# EAGLE board mediator (EAGLE 5.03)
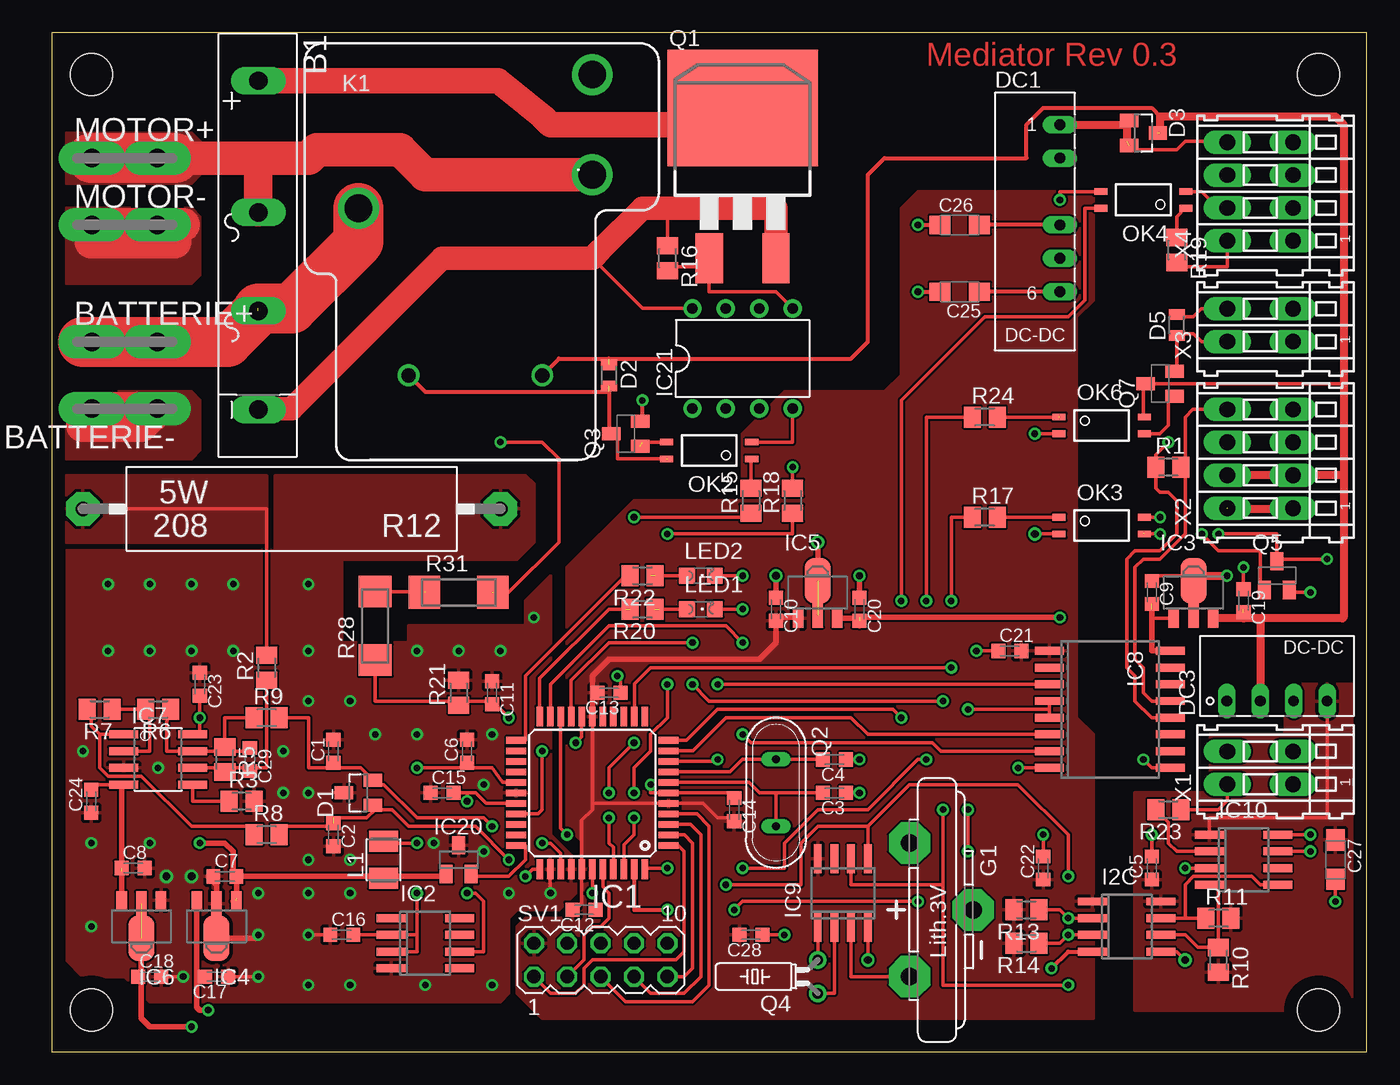
[diagram p0: board, top side]
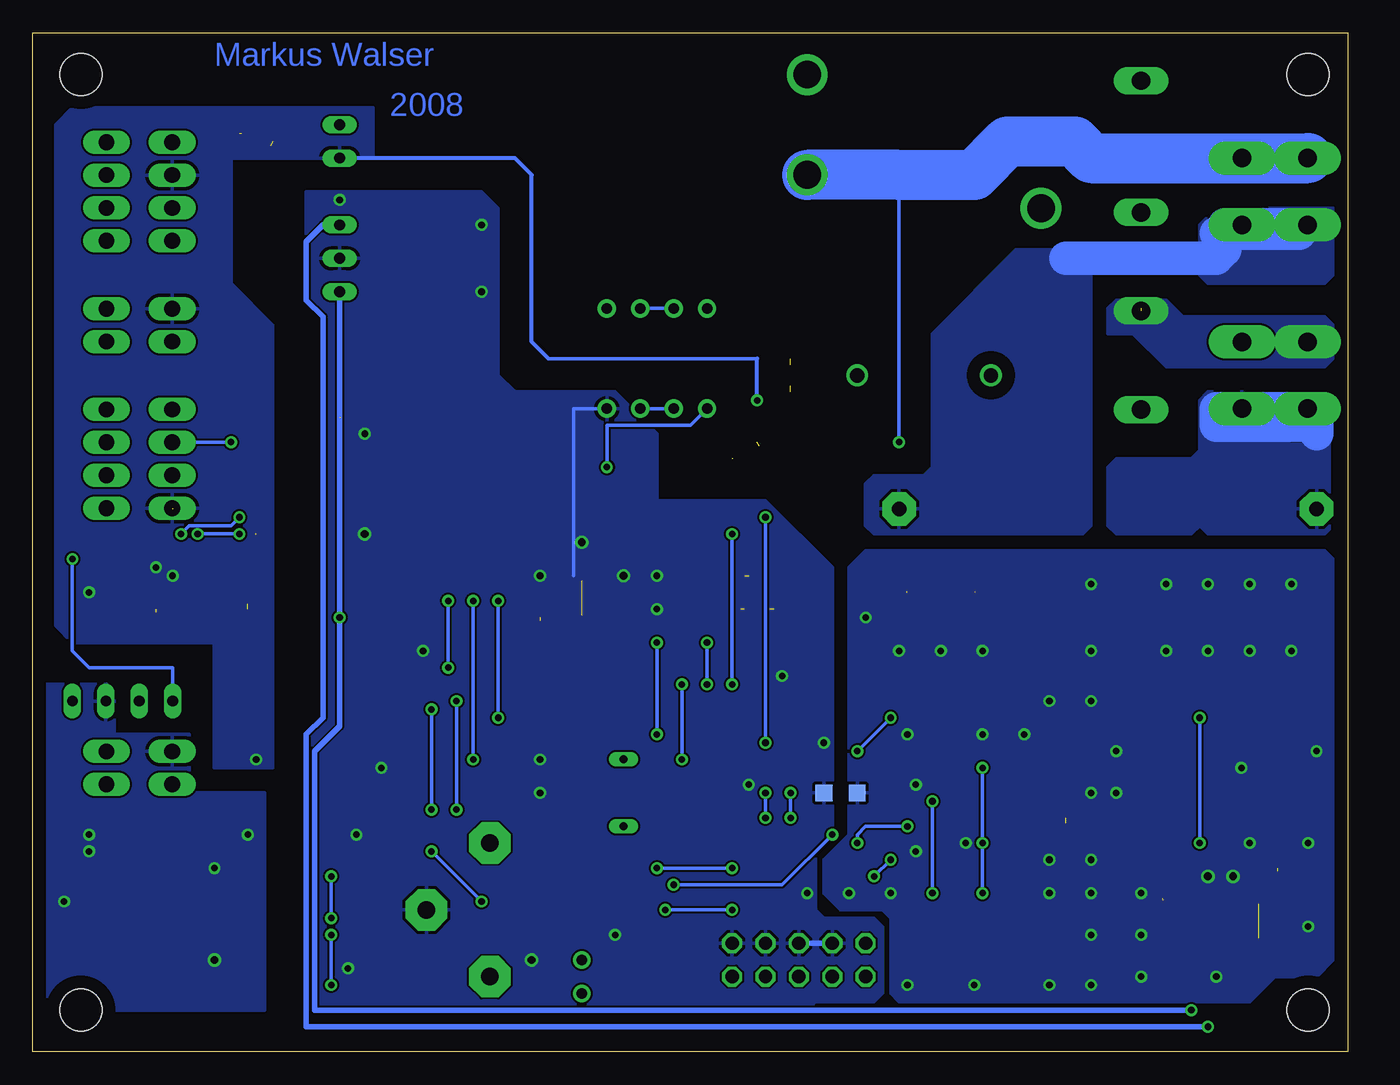
[diagram p1: board, bottom side, seen from below]

Size 100 x 77.46 mm. Coordinates in mm from the lower left corner, seen from the top.
Outline: 0,0 100,0 100,77.46 0,77.46 0,0
Copper layers (1*16): Top 0.035mm / dielectric 1.5mm / Bottom 0.035mm
Design rules "default *": minimum track width 6mil, minimum drill 12mil, track to track 6mil, track to pad 6mil, pad to pad 6mil, via to via 6mil, smd to smd 6mil, copper to edge 40mil, drill to drill 8mil, minimum pad ring 10mil, minimum via ring 8mil, stop-mask expansion 4mil, vias tented up to drill 25mil, thermal gap 10mil
Holes 3.2 mm at 96.36,3.17 3.01,3.17 96.36,74.29 3.01,74.29

## Footprints (pad centres in the part's own frame; a part is rotated, then mirrored left to right if it is on the bottom)
FB32 = drill 1.397 long: + -13.5,0; - 11.494,0; AC1 -3.492,0; AC2 4.001,0
F061.100 = drill 1.4 pad 2.54 long: A1 -2.5,0; A2 2.5,0
C0603K = smd 1.05 x 1.08: 1 -0.875,0; 2 0.875,0
SMC_A = smd 1.6 x 1.4: + -1.5,0; - 1.5,0
SOT23 = smd 1 x 1.4: 1 -0.95,-1.1; 2 0.95,-1.1; 3 0,1.1
MICROMELF-R = smd 0.8 x 1.2: A 0.8,0; C -0.8,0
NMA = drill 0.813 long: 1 0,6.35; 2 0,3.81; 4 0,-1.27; 5 0,-3.81; 6 0,-6.35
NME = drill 0.813 long: 1 0,3.81; 2 0,1.27; 3 0,-1.27; 4 0,-3.81
CR2032V = drill 1.321 pad 3.15 octagon: + -2.54,-5.08; +@1 -2.54,5.08; - 2.286,0
SO8 = smd 0.6 x 2.2: 1 -1.905,-2.6; 2 -0.635,-2.6; 3 0.635,-2.6; 4 1.905,-2.6; 5 1.905,2.6; 6 0.635,2.6; 7 -0.635,2.6; 8 -1.905,2.6
TQFP44 = smd 1.5 x 0.5: 1 -5.8,4; 2 -5.8,3.2; 3 -5.8,2.4; 4 -5.8,1.6; 5 -5.8,0.8; 6 -5.8,0; 7 -5.8,-0.8; 8 -5.8,-1.6; 9 -5.8,-2.4; 10 -5.8,-3.2; 11 -5.8,-4; 23 5.8,-4; 24 5.8,-3.2; 25 5.8,-2.4; 26 5.8,-1.6; 27 5.8,-0.8; 28 5.8,0; 29 5.8,0.8; 30 5.8,1.6; 31 5.8,2.4; 32 5.8,3.2; 33 5.8,4 | smd 0.5 x 1.5: 12 -4,-5.8; 13 -3.2,-5.8; 14 -2.4,-5.8; 15 -1.6,-5.8; 16 -0.8,-5.8; 17 0,-5.8; 18 0.8,-5.8; 19 1.6,-5.8; 20 2.4,-5.8; 21 3.2,-5.8; 22 4,-5.8; 34 4,5.8; 35 3.2,5.8; 36 2.4,5.8; 37 1.6,5.8; 38 0.8,5.8; 39 0,5.8; 40 -0.8,5.8; 41 -1.6,5.8; 42 -2.4,5.8; 43 -3.2,5.8; 44 -4,5.8
SO08 = smd 0.6 x 2.2: 1 -1.905,-2.6; 2 -0.635,-2.6; 3 0.635,-2.6; 4 1.905,-2.6; 5 1.905,2.6; 6 0.635,2.6; 7 -0.635,2.6; 8 -1.905,2.6
SOT89 = smd 0.8 x 1.4: 1 -1.499,-1.981; 3 1.499,-1.981 | smd 0.8 x 1.9: 2 0,-1.727 | smd 2 x 3.5: 2.1 0,0.889
SO08' = smd 0.61 x 2.21: 1 -1.905,-2.616; 2 -0.635,-2.616; 3 0.635,-2.616; 4 1.905,-2.616; 5 1.905,2.616; 6 0.635,2.616; 7 -0.635,2.616; 8 -1.905,2.616
SO16W = smd 0.6 x 2.2: 1 -4.445,-4.6; 2 -3.175,-4.6; 3 -1.905,-4.6; 4 -0.635,-4.6; 5 0.635,-4.6; 6 1.905,-4.6; 7 3.175,-4.6; 8 4.445,-4.6; 9 4.445,4.6; 10 3.175,4.6; 11 1.905,4.6; 12 0.635,4.6; 13 -0.635,4.6; 14 -1.905,4.6; 15 -3.175,4.6; 16 -4.445,4.6
DIL08 = drill 0.8 pad 1.4 round: 1 -3.81,-3.81; 2 -1.27,-3.81; 3 1.27,-3.81; 4 3.81,-3.81; 5 3.81,3.81; 6 1.27,3.81; 7 -1.27,3.81; 8 -3.81,3.81
JT-PCB = drill 1.1 round: 1 5.08,0; 2 -5.08,0 | drill 2.1 round: C -8.89,12.7; NC 8.89,22.86; NO 8.89,15.24
L3225M = smd 1.6 x 2.2: 1 -1.4,0; 2 1.4,0
CHIPLED_0805 = smd 1.2 x 1.2: A 0,-1.05; C 0,1.05
MINI-FLAT-4 = smd 1 x 0.5: 1 -3.24,0.635; 2 -3.24,-0.635; 3 3.24,-0.635; 4 3.24,0.635
D2PACK = smd 2.083 x 3.81: 1 -2.54,-8.89; 3 2.54,-8.89 | smd 11.43 x 8.89: 2 0,2.54
QS = drill 0.61 long: 1 -2.54,0; 2 2.54,0
SOT23-BEC = smd 1 x 1.4: B -0.95,-1.1; C 0,1.1; E 0.95,-1.1
TC26H = drill 0.813 round: 1 -1.27,0; 2 1.27,0
M0805 = smd 1.3 x 1.6: 1 -0.95,0; 2 0.95,0
KH208-8 = drill 1.1 pad 2.54 octagon: 1 -15.875,0; 2 15.875,0
MINI_MELF-0207W = smd 2.4 x 2.5: 1 -2.6,0; 2 2.6,0
MA05-2 = drill 1.016 octagon: 1 -5.08,-1.27; 2 -5.08,1.27; 3 -2.54,-1.27; 4 -2.54,1.27; 5 0,-1.27; 6 0,1.27; 7 2.54,-1.27; 8 2.54,1.27; 9 5.08,-1.27; 10 5.08,1.27
233-102 = drill 1.2 long: A1 -1.25,2.5; A2 1.25,2.5; B1 -1.25,-2.5; B2 1.25,-2.5
233-104 = drill 1.2 long: A1 -3.75,2.5; A2 -1.25,2.5; A3 1.25,2.5; A4 3.75,2.5; B1 -3.75,-2.5; B2 -1.25,-2.5; B3 1.25,-2.5; B4 3.75,-2.5
GND-GNDA = smd 1.27 x 1.27: GND -1.27,0; GNDA 1.27,0

## Placement (x,y rotation side)
B1  RECTIFIER-FB32  [FB32]  15.71,60.32 270 top
BATTERIE+  PIN2F061.100  [F061.100]  5.55,53.97 0 top
BATTERIE-  PIN2F061.100  [F061.100]  5.55,48.89 180 top
C1  100nF  [C0603K]  21.42,22.86 90 top
C2  100nF  [C0603K]  21.42,16.5 270 top
C3  18pF  [C0603K]  59.52,19.68 180 top
C4  18pF  [C0603K]  59.52,22.22 180 top
C5  100nF  [C0603K]  83.66,13.97 90 top
C6  100nF  [C0603K]  31.58,22.86 90 top
C7  100nF  [C0603K]  13.17,13.33 0 top
C8  100nF  [C0603K]  6.18,13.97 0 top
C9  100nF  [C0603K]  83.66,34.92 270 top
C10  100nF  [C0603K]  55.08,33.65 270 top
C11  100nF  [C0603K]  33.49,27.3 270 top
C12  100nF  [C0603K]  40.48,10.79 180 top
C13  100nF  [C0603K]  42.38,27.3 180 top
C14  100nF  [C0603K]  51.91,18.41 270 top
C15  100nF  [C0603K]  29.68,19.68 0 top
C16  100nF  [C0603K]  22.06,8.89 0 top
C17  100nF  [C0603K]  12.54,5.71 180 top
C18  100nF  [C0603K]  7.46,5.71 0 top
C19  100nF  [C0603K]  90.64,34.29 270 top
C20  100nF  [C0603K]  61.43,33.65 270 top
C21  100nF  [C0603K]  72.86,30.47 0 top
C22  100nF  [C0603K]  75.4,13.97 90 top
C23  100nF  [C0603K]  11.27,27.93 270 top
C24  100nF  [C0603K]  3.01,19.04 90 top
C25  10uF  [SMC_A]  69.05,57.78 180 top
C26  10uF  [SMC_A]  69.05,62.86 0 top
C27  10uF  [SMC_A]  97.62,14.6 270 top
C28  100nF  [C0603K]  53.17,8.89 180 top
C29  100nF  [C0603K]  15.08,22.22 270 top
D1  BAS40-06  [SOT23]  23.33,19.68 90 top
D2  1N4148  [MICROMELF-R]  42.38,51.43 270 top
D3  BAS40-06  [SOT23]  83.02,69.84 270 top
D5  1N4148  [MICROMELF-R]  85.56,55.24 90 top
DC1  NMA1209SC  [NMA]  76.67,64.13 0 top
DC3  NME1205SC  [NME]  93.18,26.66 90 top
G1  CR2032V  [CR2032V]  67.78,10.79 0 top
I2C  ADUM1250  [SO8]  81.75,9.52 270 top
IC1  ATMega644-A  [TQFP44]  41.11,19.68 180 top
IC2  REF192  [SO08]  28.41,8.25 270 top
IC3  78L05  [SOT89]  86.83,34.92 0 top
IC4  78L05  [SOT89]  12.54,9.52 180 top
IC5  78L05  [SOT89]  58.25,34.92 0 top
IC6  79L05  [SOT89]  6.82,9.52 180 top
IC7  OPA2735  [SO08']  8.09,22.22 270 top
IC8  ADM2483  [SO16W]  80.48,26.03 270 top
IC9  DS1307  [SO08]  60.16,12.06 0 top
IC10  DS2482-100  [SO08]  90.64,14.6 270 top
IC20  LM61  [SOT23]  30.95,14.6 0 top
IC21  PVI1050  [DIL08]  52.54,52.7 0 top
K1  JTN-PCB-DC12V  [JT-PCB]  32.22,51.43 0 top
L1  10uH  [L3225M]  25.23,14.6 90 top
LED1  Red  [CHIPLED_0805]  49.37,33.65 270 top
LED2  Green  [CHIPLED_0805]  49.37,36.19 270 top
MOTOR+  PIN2F061.100  [F061.100]  5.55,67.94 0 top
MOTOR-  PIN2F061.100  [F061.100]  5.55,62.86 0 top
OK2  TLP281  [MINI-FLAT-4]  50,45.72 180 top
OK3  TLP281  [MINI-FLAT-4]  79.84,40 0 top
OK4  TLP281  [MINI-FLAT-4]  83.02,64.77 180 top
OK6  TLP281  [MINI-FLAT-4]  79.84,47.62 0 top
Q1  IRG4BC40W  [D2PACK]  52.54,69.21 0 top
Q2  16MHz  [QS]  55.08,19.68 270 top
Q3  BC817-16SMD  [SOT23-BEC]  43.65,46.98 90 top
Q4  32768  [TC26H]  58.25,5.71 90 top
Q5  BC817-25LT1SMD  [SOT23-BEC]  93.18,36.19 0 top
Q7  BC817-16SMD  [SOT23-BEC]  84.29,50.8 90 top
R1  120  [M0805]  84.92,44.45 0 top
R2  42R2  [M0805]  16.34,29.2 90 top
R3  42R2  [M0805]  14.44,19.04 0 top
R5  1k02  [M0805]  13.17,22.22 270 top
R6  1k02  [M0805]  8.09,26.03 180 top
R7  1k02  [M0805]  3.64,26.03 180 top
R8  10k  [M0805]  16.34,16.5 0 top
R9  10k  [M0805]  16.34,25.39 0 top
R10  10k  [M0805]  88.73,6.98 270 top
R11  10k  [M0805]  88.73,10.16 0 top
R12  0.005  [KH208-8]  18.25,41.27 180 top
R13  10k  [M0805]  74.13,10.79 180 top
R14  10k  [M0805]  74.13,8.25 180 top
R15  390  [M0805]  53.17,41.91 90 top
R16  10M  [M0805]  46.82,60.32 270 top
R17  390  [M0805]  70.95,40.64 0 top
R18  180  [M0805]  56.35,41.91 90 top
R19  390  [M0805]  85.56,60.96 270 top
R20  390  [M0805]  44.92,33.65 180 top
R21  3k74  [M0805]  30.95,27.3 90 top
R22  390  [M0805]  44.92,36.19 180 top
R23  100  [M0805]  84.92,18.41 180 top
R24  390  [M0805]  70.95,48.26 0 top
R28  330k  [MINI_MELF-0207W]  24.6,32.38 90 top
R31  330k  [MINI_MELF-0207W]  30.95,34.92 0 top
SV1  [MA05-2]  41.74,6.98 0 top
X1  [233-102]  91.91,21.58 90 top
X2  [233-104]  91.91,45.08 90 top
X3  [233-102]  91.91,55.24 90 top
X4  [233-104]  91.91,65.4 90 top
~NUDEV~1  GND-GNDA  [GND-GNDA]  38.57,19.68 0 bottom

## Library data of the parts
B1 = rectifier
BATTERIE+ BATTERIE- MOTOR+ MOTOR- = con-faston
C1-C29 L1 R1-R3 R5-R11 R13-R24 R28 R31 = rcl
D1-D3 D5 = diode
DC1 DC3 = dc-dc-converter
G1 = battery
I2C = analog-devices
IC1 = atmel
IC2-IC6 IC8-IC10 = icontroller
IC7 = burr-brown
IC20 = linear
IC21 = ir
K1 = relay
LED1 LED2 = led
OK2-OK4 OK6 = optocoupler
Q1 = transistor-power
Q2 = special
Q3 Q5 Q7 = transistor-npn
Q4 = crystal
R12 = resistor-power
SV1 = con-lstb
X1-X4 = con-wago
~NUDEV~1 = supply1

## Nets
+5V: C10.2 C12.2 C13.2 C14.2 C21.2 C22.1 C28.2 I2C.1 IC1.5 IC1.17 IC1.38 IC5.1 IC8.1 IC9.8 R13.2 R14.2 SV1.2
GND: C3.1 C4.1 C10.1 C12.1 C13.1 C14.1 C20.1 C21.1 C22.2 C25.- C26.+ C28.1 DC1.5 G1.- I2C.4 IC1.6 IC1.18 IC1.39 IC5.2 IC5.2.1 IC8.8 IC9.4 IC21.4 LED1.C LED2.C OK2.2 OK3.2 OK4.3 OK6.2 SV1.4 SV1.6 SV1.8 SV1.10 ~NUDEV~1.GND
GNDA: C1.2 C2.2 C6.2 C7.1 C8.2 C11.1 C15.1 C16.1 C17.1 C18.2 C23.1 C24.1 D1.3 IC1.28 IC1.35 IC1.37 IC2.4 IC4.2 IC4.2.1 IC6.1 IC7.3 IC20.3 MOTOR-.A1 R3.2 R12.1 R21.2 ~NUDEV~1.GNDA
GNDIO: C5.2 C27.- DC3.3 I2C.5 IC10.3 IC10.7 IC10.8 X1.A2
N$1: B1.+ Q1.2
N$2: B1.- IC21.8 Q1.3 R16.1
N$3: IC9.1 Q4.2
N$4: IC7.2 R6.2 R7.1
N$5: IC7.5 R3.1
N$6: C29.2 IC7.6 R2.1 R5.2
N$7: C29.1 IC7.7 R5.1 R6.1 R9.1
N$8: IC7.1 R7.2 R8.1
N$9: C18.1 C26.- DC1.4 IC6.2 IC6.2.1
N$10: C1.1 D1.2 IC1.36 R9.2
N$11: C2.1 D1.1 IC1.34 R8.2
N$12: C3.2 IC1.7 Q2.2
N$13: C4.2 IC1.8 Q2.1
N$14: I2C.6 IC10.4 R10.1
N$15: I2C.7 IC10.5 R11.1
N$16: IC21.5 Q1.1 R16.2
N$17: IC10.2 R23.2
N$18: B1.AC2 BATTERIE+.A1 K1.C
N$19: B1.AC1 K1.NO MOTOR+.A1 R31.2
N$20: OK2.3 Q3.B
N$21: OK2.1 R15.2
N$22: C6.1 C16.2 IC1.27 IC2.2 IC2.3 L1.2
N$23: I2C.2 IC1.20 IC9.5 R13.1
N$24: I2C.3 IC1.19 IC9.6 R14.1
N$25: IC1.41 R15.1
N$26: C19.2 D2.C D3.3 DC3.2 IC3.3 K1.1 OK6.4 Q7.C X2.A2
N$27: C9.1 C19.1 D5.A DC1.2 IC3.2 IC3.2.1 IC8.9 Q3.E Q5.E X2.A1 X3.A2 X4.A3
N$28: D2.A K1.2 OK2.4 Q3.C
N$29: IC1.9 IC8.3
N$30: IC21.6 IC21.7
N$31: IC1.42 R18.1
N$32: IC21.1 R18.2
N$33: IC21.2 IC21.3
N$34: IC1.10 IC8.6
N$35: IC1.40 SV1.3
N$36: IC8.13 R1.2 X2.A4
N$37: C9.2 IC3.1 IC8.16
N$38: IC8.12 R1.1 X2.A3
N$39: IC1.43 IC8.4 IC8.5
N$40: IC1.21 IC8.7
N$41: R23.1 X1.A1
N$42: R28.2 R31.1
N$44: DC3.1 OK3.4 Q5.C
N$45: OK3.3 Q5.B
N$46: OK3.1 R17.2
N$47: IC1.13 R17.1
N$48: IC1.11 OK4.4
N$49: OK4.2 X4.A2
N$50: OK4.1 R19.1
N$51: G1.+ IC9.3
N$52: IC1.33 IC20.2
N$53: IC1.3 SV1.7
N$54: IC1.4 SV1.5
N$55: IC1.1 SV1.1
N$56: IC1.2 SV1.9
N$57: C17.2 C20.2 C25.+ DC1.6 IC4.3 IC5.3
N$58: R19.2 X4.A1
N$59: C15.2 IC1.29 IC2.6
N$61: BATTERIE-.A1 R2.2 R12.2
N$63: IC9.2 Q4.1
N$64: LED2.A R22.1
N$65: IC1.23 R22.2
N$66: IC1.22 R20.2
N$67: C11.2 IC1.30 R21.1 R28.1
N$68: LED1.A R20.1
N$73: OK6.3 Q7.B
N$74: OK6.1 R24.2
N$76: IC1.44 R24.1
N$77: D5.C Q7.E X3.A1
VCCINT: D3.1 D3.2 DC1.1 X4.A4
VCCIO: C5.1 C27.+ DC3.4 I2C.8 IC10.1 R10.2 R11.2
VDD: C7.2 C23.2 IC4.1 IC7.8 IC20.1 L1.1
VSS: C8.1 C24.2 IC6.3 IC7.4

## Tracks (layer width: path | path; a pad name or v marks a point on that pad's centre or on a via)
+5V
  Top 0.254: C12.2 39.84,10.79 40.31,11.26 IC1.38 40.31,17.61 41.11,18.41 | 41.11,18.41 IC1.17 | 41.11,18.41 41.11,18.88 IC1.5 49.53,18.88 50.63,17.77 51.91,17.77 C14.2 | 41.11,27.3 C13.2
  Top 0.406: IC1.17 41.11,27.3 41.11,28.57 42.38,29.84 53.81,29.84 55.08,31.11 C10.2 | IC5.1 56.68,33.02 55.08,33.02
  pour Top: 39.2,36.83 44.28,41.91 52.54,41.91 52.54,46.98 55.71,50.16 63.34,50.16 64.61,51.43 64.61,64.13 65.88,65.4 79.21,65.4 79.21,57.15 77.94,55.88 77.94,25.39 79.21,24.12 79.21,2.54 37.3,2.54 35.39,4.44 35.39,9.52 36.03,10.16 39.84,10.16 40.48,10.79 40.48,15.87 39.2,17.14
GND  (via drill 0.5, 0.5 pad 0.25, 0.6)  (1 unrouted)
  Top 0.254: OK2.2 56.35,46.35 IC21.4 | v45.55,20.31 45.55,19.68 46.19,19.68 | 46.19,19.68 IC1.6 | IC1.18 40.31,23.96 v39.84,23.49 | C14.1 51.51,19.68 46.19,19.68 | C3.1 v61.43,19.68 | C4.1 v61.43,22.22 | LED1.C v52.54,33.65 | LED2.C v52.54,36.19 | v73.5,21.58 IC8.8 | IC1.39 v41.11,12.06 41.35,11.82 C12.1 | OK3.2 v74.77,39.37 | OK6.2 v74.77,46.98 | C13.1 43.25,28.18 v43.02,28.57 | v70.32,30.47 C21.1 | C22.2 v75.4,16.5 | OK4.3 76.67,65.4 v76.67,64.77 | C28.1 v55.71,8.89 | v62.06,6.98 IC9.4
  Top 0.305: v76.03,6.34 77.3,7.62 I2C.4 79.21,7.62 | v65.88,62.86 C26.+ | v65.88,57.78 C25.-
  Top 0.406: C10.1 v55.08,36.19 | IC5.2.1 v58.25,38.73 | C20.1 v61.43,36.19
  Bottom 0.254: IC21.4 58.89,48.89 58.89,36.19
  Bottom 0.406: SV1.4 SV1.6
  pour Bottom: 39.2,36.83 39.2,16.5 40.48,15.24 40.48,10.79 39.84,10.16 36.03,10.16 35.39,9.52 35.39,4.44 36.03,3.8 40.48,3.8 41.11,3.17 79.21,3.17 79.21,65.4 65.88,65.4 64.61,64.13 64.61,51.43 63.34,50.16 55.71,50.16 52.54,46.98 52.54,41.91 44.28,41.91
GNDA  (via drill 0.5, 0.6)
  Top 0.254: IC20.3 30.95,15.87 | v19.52,8.89 C16.1 | v10,5.71 8.73,5.71 | C17.1 v15.71,5.71 | IC1.35 37.91,12.09 v37.94,12.06
  Top 0.406: C7.1 11.9,13.33 12.54,12.7 IC4.2 | IC4.2.1 15.46,8.63 v15.71,8.89
  Top 2.54: 10,62.86 MOTOR-.A1 3.01,62.82 3.01,61.59 9.36,61.59
  Bottom 2.54: 21.42,60.32 10,60.32 9.36,60.96 9.36,62.86 MOTOR-.A1 3.68,62.23 10,62.23
  other vias: 32.85,20.31 29.04,15.87 8.09,21.58 19.52,19.68 22.7,26.66 19.52,14.6 8.73,13.33 10.63,13.33 34.12,30.47 30.95,30.47 22.7,5.08 10.63,30.47 2.38,22.86 4.28,35.55 7.46,35.55 10.63,35.55 13.81,35.55 19.52,26.66 3.01,15.87 3.01,9.52 33.49,5.08 19.52,5.08 19.52,35.55 27.77,24.12 19.52,12.06 7.46,30.47 4.28,30.47 19.52,30.47 24.6,24.12 7.46,15.87 34.76,12.06 32.85,15.24 13.81,30.47 17.61,19.68 27.77,30.47 22.7,14.6 22.7,12.06 28.41,5.08 17.61,22.86 33.49,24.12 36.66,33.02 15.71,12.06
  pour Bottom (rank 2): 39.84,12.06 39.84,14.6 37.94,16.5 37.94,36.83 36.66,38.1 1.74,38.1 1.1,37.46 1.1,6.98 2.38,5.71 5.55,5.71 7.46,3.8 34.12,3.8 34.76,4.44 34.76,10.16 35.39,10.79 38.57,10.79
  pour Bottom (isolate 1.016): 19.52,60.96 25.23,60.96 31.58,54.61 31.58,44.45 32.22,43.81 36.03,43.81 36.66,43.18 36.66,40 36.03,39.37 20.15,39.37 19.52,40
  pour Bottom (no thermals): 1.1,64.13 10,64.13 11.27,62.86 11.27,59.05 10.63,58.41 1.74,58.41 0.47,59.69 0.47,63.5
  pour Top: 1.1,38.1 22.06,38.1 22.06,31.11 36.66,31.11 37.94,32.38 37.94,16.5 39.84,14.6 39.84,12.06 38.57,10.79 35.39,10.79 34.76,10.16 34.76,4.44 34.12,3.8 7.46,3.8 5.55,5.71 2.38,5.71 1.1,6.98
  pour Top: 35.39,37.46 36.66,38.73 36.66,43.18 36.03,43.81 16.98,43.81 16.98,37.46
  pour Top: 27.14,32.38 36.03,32.38 36.03,34.29 37.94,36.19 37.94,29.2 27.14,29.2
  pour Top (no thermals): 0.47,59.05 0.47,63.5 1.1,64.13 10.63,64.13 11.27,63.5 11.27,59.05 10.63,58.41 1.1,58.41
GNDIO  (via drill 0.5, 0.5 pad 0.25, 0.6)
  Top 0.254: I2C.5 85.56,7.62 v86.19,6.98 | IC10.7 v95.72,15.24 | IC10.8 v95.72,16.5 | v86.19,13.97 IC10.3 | C5.2 v83.66,16.5 | C27.- v97.62,11.43
  Top 0.305: 83.66,7.62 I2C.5
  pour Bottom: 82.39,3.17 82.39,19.68 88.1,19.68 88.1,24.12 93.81,24.12 93.81,27.93 99.53,27.93 99.53,3.17
N$1
  Top 1.778: Q1.2 51.27,70.48 50,70.48
  Top 1.93: B1.+ 33.96,73.82 37.3,71.11 37.94,70.48 50,70.48
N$2
  Top 0.254: 46.82,64.13 R16.1 | 41.74,60.96 41.74,60.79 | IC21.8 44.92,56.51 41.11,60.32
  Top 1.778: Q1.3 55.08,64.13 46.82,64.13 44.92,64.13 41.74,60.96 41.11,60.32 29.68,60.32 18.25,48.89 15.71,48.89 B1.-
N$3
  Top 0.254: Q4.2 IC9.1
N$4
  Top 0.254: IC7.2 7.46,22.86 7.46,25.71 R6.2 R7.1 4.28,26.03
N$5
  Top 0.254: 10.63,20.31 IC7.5 10.71,19.04 R3.1
N$6
  Top 0.254: 10.63,21.58 IC7.6 12.85,21.58 R5.2 13.17,21.58 15.08,21.58 | R2.1 16.34,21.58 15.08,21.58 | 15.08,21.58 C29.2
N$7
  Top 0.254: R6.1 8.73,25.08 8.73,22.86 10.63,22.86 | 10.63,22.86 IC7.7 | 10.63,22.86 13.17,22.86 | R9.1 13.17,25.39 R5.1 13.17,22.86 | C29.1 15.08,22.86 13.17,22.86
N$8
  Top 0.254: 3.64,24.12 IC7.1 | R8.1 14.76,17.14 10.63,17.14 6.82,20.95 4.28,20.95 3.64,21.58 3.64,24.12 | R7.2 arc-90 3.01,25.71 3.01,24.76 3.64,24.12
N$9  (via drill 0.5)  (1 unrouted)
  Top 0.254: 6.82,5.71 C18.1
  Top 0.305: DC1.4 C26.-
  Top 0.406: v10.63,1.9 7.46,1.9 6.82,2.54 6.82,5.71 IC6.2
  Bottom 0.406: v10.63,1.9 79.21,1.9 79.21,24.12 77.94,25.39 77.94,55.88 79.21,57.15 79.21,61.59 77.94,62.86 DC1.4
N$10  (via drill 0.5)
  Top 0.254: v37.3,15.87 37.94,15.87 38.71,15.1 IC1.36 | v33.49,17.14 32.85,17.77 27.77,17.77 25.23,20.31 24.6,20.31 24.43,20.48 D1.2 23.47,21.58 21.82,21.58 C1.1 21.03,21.58 19.52,21.58 19.52,25.39 R9.2
  Bottom 0.254: v33.49,17.14 36.66,17.14 37.3,16.5 v37.3,15.87
N$11  (via drill 0.5)  (1 unrouted)
  Top 0.254: C2.1 20.79,17.14 17.29,17.14 R8.2 | 24.6,18.41 24.43,18.58 D1.1 | 24.6,18.41 25.87,18.41 27.14,17.14 32.22,17.14 v34.76,14.6 | IC1.34 36.58,13.88 v36.03,13.33 | 24.6,18.41 23.96,17.77 21.42,17.77
  Bottom 0.254: v34.76,14.6 v36.03,13.33
N$12
  Top 0.254: IC1.7 53.01,20.48 53.81,19.68 55.08,19.68 | 55.08,19.68 C3.2 | 55.08,19.68 Q2.2
N$13
  Top 0.254: C4.2 Q2.1 52.54,22.22 51.6,21.28 IC1.8
N$14
  Top 0.254: I2C.6 86.19,8.89 87.15,7.93 88.41,7.93 | IC10.4 88.73,12.7 88.73,8.25 88.41,7.93 | 88.41,7.93 R10.1
N$15
  Top 0.254: I2C.7 86.19,10.16 | 86.19,10.16 R11.1 | IC10.5 91.91,12.7 91.28,13.33 86.83,13.33 86.19,12.7 86.19,10.16
N$16
  Top 0.254: R16.2 46.82,59.69 49.37,59.69 Q1.1 50,57.78 55.08,57.78 IC21.5
N$17
  Top 0.254: IC10.2 85.56,15.24 84.92,15.87 84.92,17.46 R23.2
N$18  (1 unrouted)
  Top 3.81: K1.C 23.33,61.59 18.25,56.51 15.71,56.51 | B1.AC2 13.36,53.97 BATTERIE+.A1 2.38,53.97
  pour Bottom (no thermals): 0.47,53.34 0.47,54.61 1.74,55.88 12.54,55.88 13.81,57.15 17.61,57.15 18.25,56.51 18.25,54.61 16.34,54.61 13.81,52.07 1.74,52.07
N$19  (via drill 0.5)  (1 unrouted)
  Top 0.254: R31.2 34.19,34.23 | v34.12,46.35 37.3,46.35 38.57,45.08 38.57,38.73 34.76,34.92 33.49,34.92 34.12,34.29
  Top 2.184: 15.71,67.94 B1.AC1
  Top 2.54: K1.NO 28.41,66.67 26.5,68.57 20.15,68.57 19.52,67.94 15.71,67.94 9.36,67.94
  Top 3.81: 9.36,67.94 MOTOR+.A1
  Bottom 0.254: v34.12,46.35 34.12,66.67
  Bottom 3.81: K1.NO 34.12,66.67 28.41,66.67 25.87,69.21 20.79,69.21 19.52,67.94 3.01,67.94
  pour Top (no thermals): 0.47,67.94 0.47,69.21 1.1,69.84 10.63,69.84 11.27,69.21 11.27,66.67 10.63,66.03 1.1,66.03 0.47,66.67
N$20  (1 unrouted)
  Top 0.254: OK2.3 44.92,46.35 44.92,45.72
N$21
  Top 0.254: OK2.1 53.17,45.15 R15.2
N$22  (via drill 0.5)
  Top 0.254: IC1.27 34.29,20.48 33.49,21.58 31.58,21.58 | v27.77,21.58 31.58,21.58 | L1.2 24.73,15.87 v27.77,15.87 | 27.77,8.89 27.77,7.62 IC2.3 | 27.77,8.89 v27.77,12.06 | 25.87,8.89 27.77,8.89 | 25.87,8.89 IC2.2 | C16.2 25.87,8.89 | 31.58,21.58 C6.1
  Bottom 0.254: v27.77,21.58 v27.77,15.87 v27.77,12.06
N$23  (via drill 0.5)
  Top 0.254: I2C.2 v77.3,10.16 76.67,10.79 R13.1 | IC1.20 38.71,17 v39.2,16.5 | 62.06,17.14 65.24,20.31 73.5,20.31 77.3,16.5 v77.3,13.33 | v51.27,12.7 56.98,12.7 56.98,15.87 58.25,17.14 62.06,17.14 | 62.06,17.14 IC9.5
  Bottom 0.254: v39.2,16.5 43.02,12.7 v51.27,12.7 | v77.3,13.33 v77.3,10.16
N$24  (via drill 0.5)
  Top 0.254: R14.1 76.67,8.25 v77.3,8.89 I2C.3 | v67.78,26.66 50,26.66 v48.73,27.93 | 67.78,12.7 67.78,5.08 v77.3,5.08 | IC9.6 60.8,12.7 67.78,12.7 | v67.78,18.41 67.78,12.7 | v48.73,31.11 42.38,31.11 39.51,28.24 IC1.19
  Top 0.305: I2C.3 79.21,8.89
  Bottom 0.254: v67.78,26.66 v67.78,18.41 | v77.3,5.08 v77.3,8.89 | v48.73,31.11 v48.73,27.93
N$25  (via drill 0.5)
  Top 0.254: R15.1 53.81,40.64 v44.28,40.64 | v44.28,23.49 42.38,21.58 v42.38,19.68 | v42.38,17.77 42.38,15.87 42.71,15.54 IC1.41
  Bottom 0.254: v44.28,23.49 v44.28,40.64 | v42.38,17.77 v42.38,19.68
N$26  (3 unrouted)
  Top 0.254: 91.86,32.94 91.91,32.89 | OK6.4 83.02,48.32 83.02,50.62 Q7.C 98.26,50.8
  Top 0.305: K1.1 38.57,52.7 42.38,52.7 60.8,52.7 62.06,53.97 62.06,66.67 63.34,67.94 74.13,67.94 74.13,70.48 75.4,71.75 83.66,71.75 84.29,71.11 | 98.26,33.02 98.18,32.94
  Top 0.61: 98.18,32.94 91.86,32.94 90.64,32.94 | 91.91,32.89 DC3.2 | 98.26,43.81 98.26,50.8 98.26,70.48 97.62,71.11 84.29,71.11 84.29,69.84 | 98.26,43.81 98.26,33.02 | X2.A2 98.26,43.83 98.26,43.81 | 90.64,32.94 IC3.3 | 90.64,32.94 90.64,33.65
N$27  (via drill 0.5)  (1 unrouted)
  Top 0.254: X3.A2 87.44,56.49 86.83,55.88 85.72,55.88 D5.A | C9.1 84.05,36.19 86.83,36.19 | Q5.E 94.3,34.92 v95.72,34.92 | IC8.9 83.66,21.58 v83.02,22.22 | Q3.E 44.92,47.94 | C19.1 v90.64,36.83
  Top 0.305: 44.92,47.94 v44.92,49.53
  Top 0.61: v89.37,36.19 86.83,36.19 IC3.2.1 IC3.2 | 89.37,41.27 94.45,41.27
  Bottom 0.254: 44.92,52.7 60.8,52.7
  Bottom 0.305: v44.92,49.53 44.92,52.7 | 60.8,52.7 62.06,53.97 62.06,66.67 63.34,67.94 DC1.2
  pour Bottom: 74.13,71.75 96.99,71.75 98.26,70.48 98.26,32.38 96.99,31.11 86.19,31.11 86.19,21.58 81.75,21.58 81.75,55.24 84.92,58.41 84.92,67.94 74.13,67.94
N$28  (2 unrouted)
  Top 0.254: 46.82,45.08 43.02,45.08 43.02,46.98 Q3.C 42.38,46.98
  Top 0.305: K1.2 28.41,50.16 42.38,50.16 42.38,46.98
N$29  (via drill 0.5)
  Top 0.254: v50.63,27.93 IC8.3 | IC1.9 50.49,22.08 v50.63,22.22
  Bottom 0.254: v50.63,22.22 v50.63,27.93
N$30
  Bottom 0.254: IC21.7 IC21.6
N$31  (via drill 0.5)
  Top 0.254: 56.35,40.64 R18.1 56.35,39.37 v46.82,39.37 | v44.28,19.68 44.28,21.58 45.55,22.86 45.55,24.12 46.82,25.39 v46.82,27.93 | v44.28,17.77 44.28,16.5 43.51,15.73 IC1.42
  Bottom 0.254: v46.82,27.93 v46.82,39.37 | v44.28,17.77 v44.28,19.68
N$32  (via drill 0.5)
  Top 0.254: v56.35,44.45 R18.2
  Bottom 0.254: IC21.1 50,47.62 56.35,47.62 v56.35,44.45
N$33
  Bottom 0.254: IC21.2 IC21.3
N$34
  Top 0.254: IC8.6 62.06,24.12 60.8,25.39 51.27,25.39 48.75,22.88 IC1.10
N$35
  Top 0.254: IC1.40 41.91,12.53 42.38,12.06 42.38,10.16 41.74,9.52 41.11,9.52 40.48,8.89 40.48,6.98 SV1.3
N$36
  Top 0.254: X2.A4 86.77,48.83 86.19,48.26 86.19,44.77 R1.2 86.19,44.12 86.19,39.37 84.29,37.46 83.02,37.46 82.39,36.83 82.39,29.84 83.02,29.2 83.02,27.3 83.66,26.66 IC8.13
N$37  (1 unrouted)
  Top 0.254: IC3.1 83.66,32.94 83.66,33.02
  Top 0.406: IC8.16 83.66,30.47 83.66,33.02 83.66,33.65
N$38  (via drill 0.5)
  Top 0.254: IC8.12 83.66,25.39 82.39,26.66 82.39,28.57 81.75,29.2 81.75,37.46 82.39,38.1 84.29,38.1 85.56,39.37 85.56,41.91 84.92,42.54 84.29,42.54 83.97,42.86 R1.1 83.97,45.4 v84.92,46.35
  Bottom 0.254: X2.A3 85.58,46.33 v84.92,46.35
N$39  (via drill 0.5, 0.5 pad 0.25)
  Top 0.254: 75.88,26.03 IC8.4 | 75.88,26.03 IC8.5 | v69.69,26.03 75.88,26.03 | v69.69,15.24 v69.69,18.41 | v51.91,10.79 52.54,11.43 v65.88,11.43
  Top 0.305: IC1.43 44.31,10.79 v46.82,10.79
  Bottom 0.254: v69.69,18.41 v69.69,26.03 | v46.82,10.79 v51.91,10.79 | v65.88,11.43 v69.69,15.24
N$40  (via drill 0.5 pad 0.25)
  Top 0.254: IC8.7 67.62,22.86 66.99,23.49 53.17,23.49 v52.54,24.12 | IC1.21 37.94,25.5 37.94,27.93 42.38,32.38 51.27,32.38 v52.54,31.11
  Bottom 0.254: v52.54,31.11 v52.54,24.12
N$41
  Top 0.254: R23.1 88.73,18.41 89.41,19.08 X1.A1
N$42  (1 unrouted)
  Top 0.254: R28.2 28.35,34.98 28.41,34.92
N$44  (via drill 0.5)
  Top 0.254: v96.99,37.46 93.35,37.46 Q5.C 93.18,39.37 v88.73,39.37 | v84.29,40.64 OK3.4
  Bottom 0.254: v96.99,37.46 96.99,30.47 95.72,29.2 89.37,29.2 DC3.1 | v84.29,40.64 84.92,40 88.1,40 v88.73,39.37
N$45  (via drill 0.5)  (1 unrouted)
  Top 0.254: 83.02,39.37 v84.29,39.37 | Q5.B 91.91,35.41 91.91,38.1 88.73,38.1 v87.47,39.37
  Bottom 0.254: v84.29,39.37 v87.47,39.37
N$46
  Top 0.254: R17.2 OK3.1
N$47  (via drill 0.5)
  Top 0.254: IC1.13 44.31,27.96 45.55,29.2 v68.41,29.2 | v68.41,34.29 68.41,40.64 R17.1
  Bottom 0.254: v68.41,29.2 v68.41,34.29
N$48  (via drill 0.5)
  Top 0.254: v64.61,25.39 63.97,26.03 50.63,26.03 48.28,23.68 IC1.11 | v64.61,34.29 64.61,49.53 70.95,55.88 77.3,55.88 78.58,57.15 78.58,64.13 OK4.4
  Bottom 0.254: v64.61,25.39 v64.61,34.29
N$49
  Top 0.254: OK4.2 87.47,65.4 88.73,64.13 89.37,64.13 89.39,64.15 X4.A2
N$50
  Top 0.254: OK4.1 86.26,64.19 85.56,63.5 R19.1
N$51
  Top 0.254: IC9.3 60.8,5.71 G1.+
N$52
  Top 0.254: 32.07,13.33 34.76,13.33 36.03,14.6 36.03,15.68 35.39,15.68
  Top 0.406: 35.39,15.68 IC1.33 | IC20.2 32.07,13.33
N$53
  Top 0.254: IC1.3 48.59,17.28 49.37,16.5 49.37,5.71 48.09,4.44 45.55,4.44 SV1.7
N$54
  Top 0.254: IC1.4 49.06,18.08 50,17.14 50,5.08 48.73,3.8 43.65,3.8 SV1.5
N$55
  Top 0.254: IC1.1 47.65,15.68 48.09,15.24 48.09,7.62 47.46,6.98 41.11,6.98 40.48,6.34 40.48,5.08 39.84,4.44 37.94,4.44 SV1.1
N$56
  Top 0.254: IC1.2 48.12,16.48 48.73,15.87 48.73,6.34 48.09,5.71 SV1.9
N$57  (via drill 0.5)  (2 unrouted)
  Top 0.254: 11.04,5.71 C17.2
  Top 0.305: 70.32,57.78 C25.+ DC1.6
  Top 0.406: v11.9,3.17 11.27,3.17 11.04,3.4 11.04,5.71 IC4.3 | v76.67,33.02 61.43,33.02 | IC5.3 61.43,32.94 61.43,32.38
  Bottom 0.406: v11.9,3.17 78.58,3.17 78.58,22.86 76.67,24.76 v76.67,33.02 DC1.6
N$58
  Top 0.254: R19.2 86.19,59.69 89.41,59.69 X4.A1
N$59  (via drill 0.5)
  Top 0.254: IC2.6 32.85,7.62 32.85,11.43 32.22,12.06 v31.58,12.06 | 31.58,19.68 C15.2 | v31.58,19.04 31.58,19.68 | 31.58,19.68 32.22,19.68 33.02,18.88 IC1.29
  Bottom 0.254: v31.58,12.06 v31.58,19.04
N$61
  Top 0.254: R2.2 16.34,41.27 R12.2
  Top 2.54: 2.38,47.62 6.82,47.62 8.05,48.85 BATTERIE-.A1 3.01,48.89
  Bottom 2.54: 3.01,48.89 10,48.89 10,47.62 3.01,47.62 2.38,46.98 2.38,48.26 3.01,48.89
  pour Bottom (isolate 1.27): 1.1,50.16 10.63,50.16 11.27,49.53 11.27,45.72 11.9,45.08 17.61,45.08 18.25,44.45 18.25,40 17.61,39.37 11.9,39.37 11.27,40 10.63,39.37 1.74,39.37 0.47,40.64 0.47,49.53
  pour Top: 0.47,39.37 0.47,43.18 1.1,43.81 16.34,43.81 16.34,38.73 1.1,38.73
  pour Top (no thermals): 0.47,48.89 0.47,49.53 1.1,50.16 10.63,50.16 11.27,49.53 11.27,45.72 10.63,45.08 1.1,45.08 0.47,45.72
N$63
  Top 0.254: IC9.2 59.52,4.44 Q4.1
N$64  (1 unrouted)
  Top 0.254: 45.55,36.19 LED2.A
N$65
  Top 0.254: 42.38,34.92 36.03,28.57 36.03,23.68 IC1.23 | 42.38,34.92 42.7,35.24 | R22.2 43.65,36.19 42.38,34.92
N$66  (1 unrouted)
  Top 0.254: IC1.22 37.11,28.38 42.38,33.65 43.65,33.65
N$67  (via drill 0.5)
  Top 0.254: R28.1 24.6,26.66 31.58,26.66 | v34.76,25.39 34.12,26.03 C11.2 33.25,26.66 31.58,26.66 | IC1.30 36.97,18.08 37.3,18.41 v37.3,22.86 | 31.58,26.66 R21.1
  Bottom 0.254: v37.3,22.86 v34.76,25.39
N$68  (1 unrouted)
  Top 0.254: LED1.A 46.19,33.65
N$73
  Top 0.254: OK6.3 84.29,46.98 84.92,47.62 84.92,49.38 Q7.B
N$74  (1 unrouted)
  Top 0.254: R24.2 76.67,48.26
N$76  (via drill 0.5)
  Top 0.254: v52.54,13.97 55.71,13.97 55.71,15.87 58.25,18.41 62.06,18.41 65.88,22.22 v66.51,22.22 | v66.51,34.29 66.51,48.26 R24.1 | IC1.44 45.11,13.97 v46.82,13.97
  Bottom 0.254: v46.82,13.97 v52.54,13.97 | v66.51,22.22 v66.51,34.29
N$77
  Top 0.254: X3.A1 89.39,53.97 87.47,53.97 86.83,54.61 85.72,54.61 D5.C 85.56,51.91 Q7.E
VCCINT  (1 unrouted)
  Top 0.254: D3.1 81.61,70.48 81.75,70.33 | X4.A4 89.35,69.21 86.19,69.21 85.56,68.57 81.75,68.57 81.75,69.21
  Top 0.61: DC1.1 81.61,70.48 | 81.75,70.33 81.75,69.21
VCCIO
  Top 0.254: 83.66,11.43 I2C.8 84.92,11.43 | DC3.4 96.99,17.77 88.04,17.77 IC10.1
  Top 0.305: R10.2 88.73,5.71 | I2C.8 84.29,11.43
  pour Top: 82.39,19.68 88.1,19.68 88.1,24.12 93.81,24.12 93.81,27.93 98.89,27.93 98.89,3.8 98.26,3.17 82.39,3.17
VDD  (via drill 0.5)  (1 unrouted)
  Top 0.254: 10.63,24.12 IC7.8 11.27,24.12 v11.27,25.39 C23.2 | 24.6,13.33 L1.1
  Top 0.406: IC20.1 29.83,13.33 24.6,13.33 C7.2 | C7.2 13.81,13.33 13.81,15.24 13.17,15.87 v11.27,15.87 | C7.2 14.04,11.67 13.81,11.43
  Bottom 0.254: v11.27,15.87 v11.27,25.39
VSS  (1 unrouted)
  Top 0.254: C24.2 3.01,20.31 IC7.4
  Top 0.406: IC7.4 5.47,20.24 5.31,20.07 C8.1 | IC6.3 5.32,13.74 5.55,13.97

## Text on the board
Top: Mediator Rev 0.3
Bottom: Markus Walser | 2008